# EAGLE board TinyCube11b_Lib (EAGLE 7.5.0)
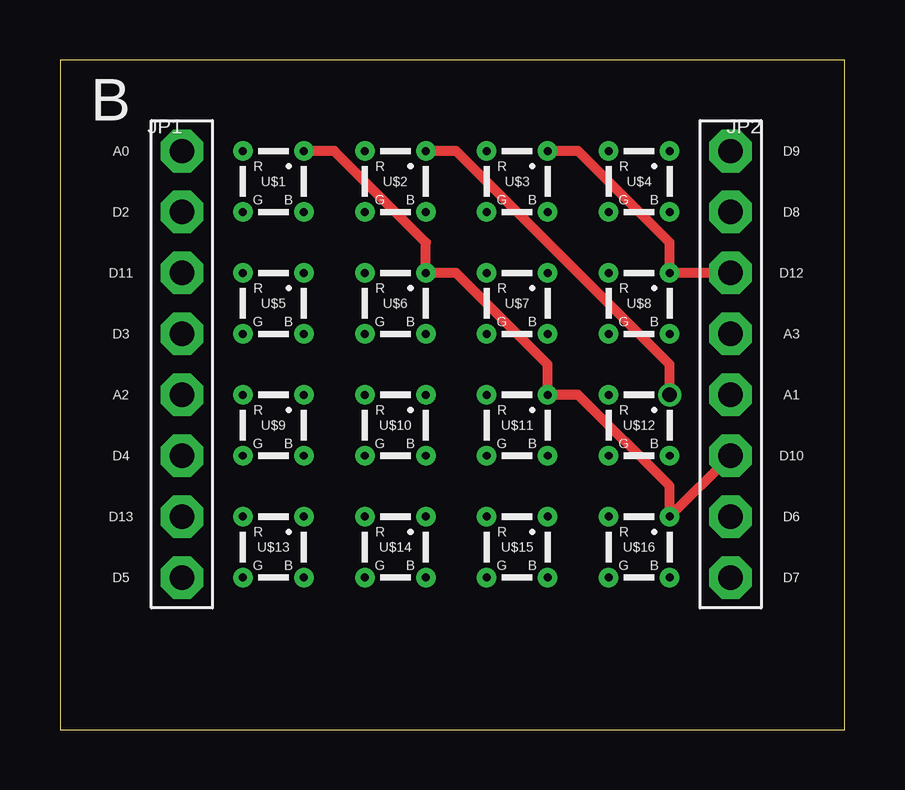
[diagram p0: board, top side]
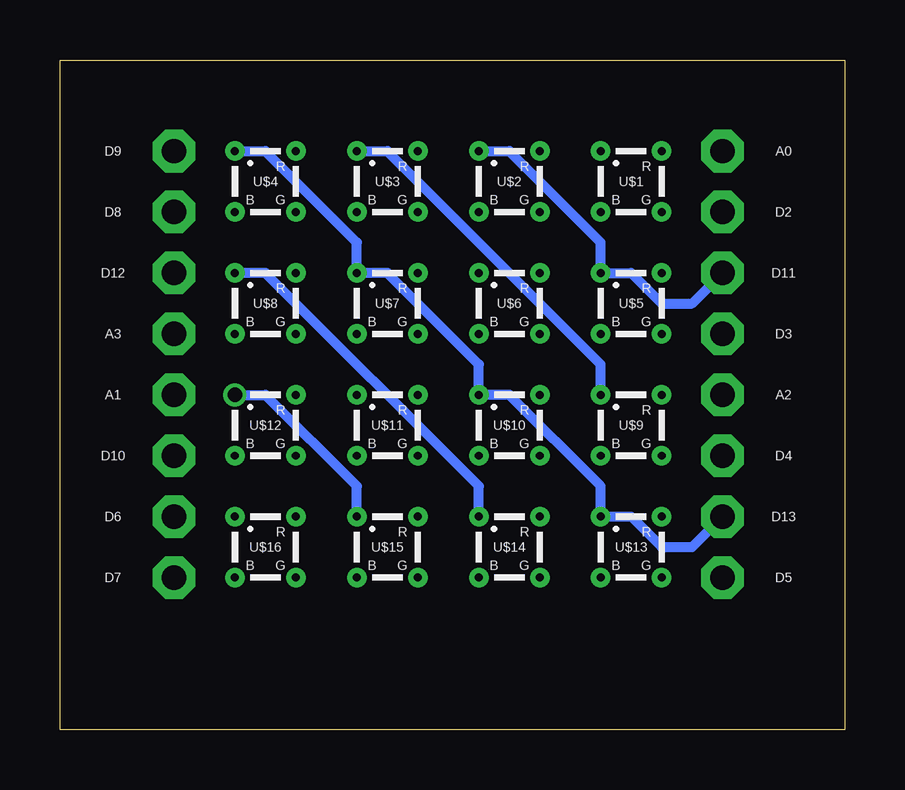
[diagram p1: board, bottom side, seen from below]

Size 32.69 x 27.93 mm. Coordinates in mm from the lower left corner, seen from the top.
Outline: 0,0 32.69,0 32.69,27.93 0,27.93 0,0
Copper layers (1*16): Top 0.0356mm / dielectric 1.5011mm / Bottom 0.0356mm
Design rules "LaenPCBOrder": minimum track width 6mil, minimum drill 13mil, track to track 6mil, track to pad 6mil, pad to pad 6mil, via to via 6mil, smd to smd 6mil, copper to edge 15mil, drill to drill 6mil, minimum pad ring 7mil, minimum via ring 7mil, stop-mask expansion 3mil, vias tented up to drill 0mil, thermal gap 10mil

## Footprints (pad centres in the part's own frame; a part is rotated, then mirrored left to right if it is on the bottom)
1X08-BIG = drill 1.016 pad 1.778 octagon: 1 -8.89,0; 2 -6.35,0; 3 -3.81,0; 4 -1.27,0; 5 1.27,0; 6 3.81,0; 7 6.35,0; 8 8.89,0
10MIL = drill 0.33 pad 0.813: + 1.27,1.27; B 1.27,-1.27; G -1.27,-1.27; R -1.27,1.27

## Placement (x,y rotation side)
JP1  [1X08-BIG]  5.08,15.24 270 top
JP2  [1X08-BIG]  27.94,15.24 270 top
U$1  PILLAR  [10MIL]  8.89,22.86 0 top
U$2  PILLAR  [10MIL]  13.97,22.86 0 top
U$3  PILLAR  [10MIL]  19.05,22.86 0 top
U$4  PILLAR  [10MIL]  24.13,22.86 0 top
U$5  PILLAR  [10MIL]  8.89,17.78 0 top
U$6  PILLAR  [10MIL]  13.97,17.78 0 top
U$7  PILLAR  [10MIL]  19.05,17.78 0 top
U$8  PILLAR  [10MIL]  24.13,17.78 0 top
U$9  PILLAR  [10MIL]  8.89,12.7 0 top
U$10  PILLAR  [10MIL]  13.97,12.7 0 top
U$11  PILLAR  [10MIL]  19.05,12.7 0 top
U$12  PILLAR  [10MIL]  24.13,12.7 0 top
U$13  PILLAR  [10MIL]  8.89,7.62 0 top
U$14  PILLAR  [10MIL]  13.97,7.62 0 top
U$15  PILLAR  [10MIL]  19.05,7.62 0 top
U$16  PILLAR  [10MIL]  24.13,7.62 0 top

## Library data of the parts
JP1 JP2 = adafruit
U$1-U$16 = PILLAR

## Nets
N$1: JP1.3 U$2.+ U$5.+ U$12.+ U$15.+
N$2: JP1.7 U$4.+ U$7.+ U$10.+ U$13.+
N$3: JP2.6 U$1.+ U$6.+ U$11.+ U$16.+
N$4: JP2.3 U$3.+ U$8.+ U$9.+ U$14.+

## Tracks (layer width: path | path; a pad name or v marks a point on that pad's centre or on a via)
N$1  (via drill 0.6 pad 0.61)
  Top 0.406: U$12.+ 25.4,15.24 16.51,24.13 U$2.+
  Bottom 0.406: JP1.3 6.35,17.78 7.62,17.78 8.89,19.05 U$5.+ 10.16,20.32 13.97,24.13 U$2.+ | U$15.+ 20.32,10.16 24.13,13.97 U$12.+
  other vias: 25.4,13.97
N$2
  Bottom 0.406: JP1.7 6.35,7.62 7.62,7.62 8.89,8.89 U$13.+ 10.16,10.16 13.97,13.97 U$10.+ 15.24,15.24 19.05,19.05 U$7.+ 20.32,20.32 24.13,24.13 U$4.+
N$3
  Top 0.406: U$1.+ 11.43,24.13 15.24,20.32 U$6.+ 16.51,19.05 20.32,15.24 U$11.+ 21.59,13.97 25.4,10.16 U$16.+ JP2.6
N$4  (via drill 0.33)
  Top 0.406: U$3.+ 21.59,24.13 25.4,20.32 U$8.+ JP2.3
  Bottom 0.406: U$9.+ 10.16,15.24 19.05,24.13 U$3.+ | U$14.+ 15.24,10.16 24.13,19.05 U$8.+
  other vias: 25.4,19.05

## Text on the board
tNames: B | A0 | D9 | D2 | D8 | D11 | D12 | D3 | A3 | A2 | A1 | D4 | D10 | D13 | D6 | D5 | D7
bNames: A0 | D9 | D2 | D8 | D11 | D12 | D3 | A3 | A2 | A1 | D4 | D10 | D13 | D6 | D5 | D7